# Altium PCB MYBOARD.PcbDoc (part 2 of 2)
Units mil, origin at the board's own origin, x right, y up, seen from the top; angles counter-clockwise.
Board outline 4724.41 x 3940 mil, 2 copper layers (Top Layer, Bottom Layer); 166 components, 173 nets, 742 pads, 144 vias.
Unrouted connection lines stored in the file: 194.
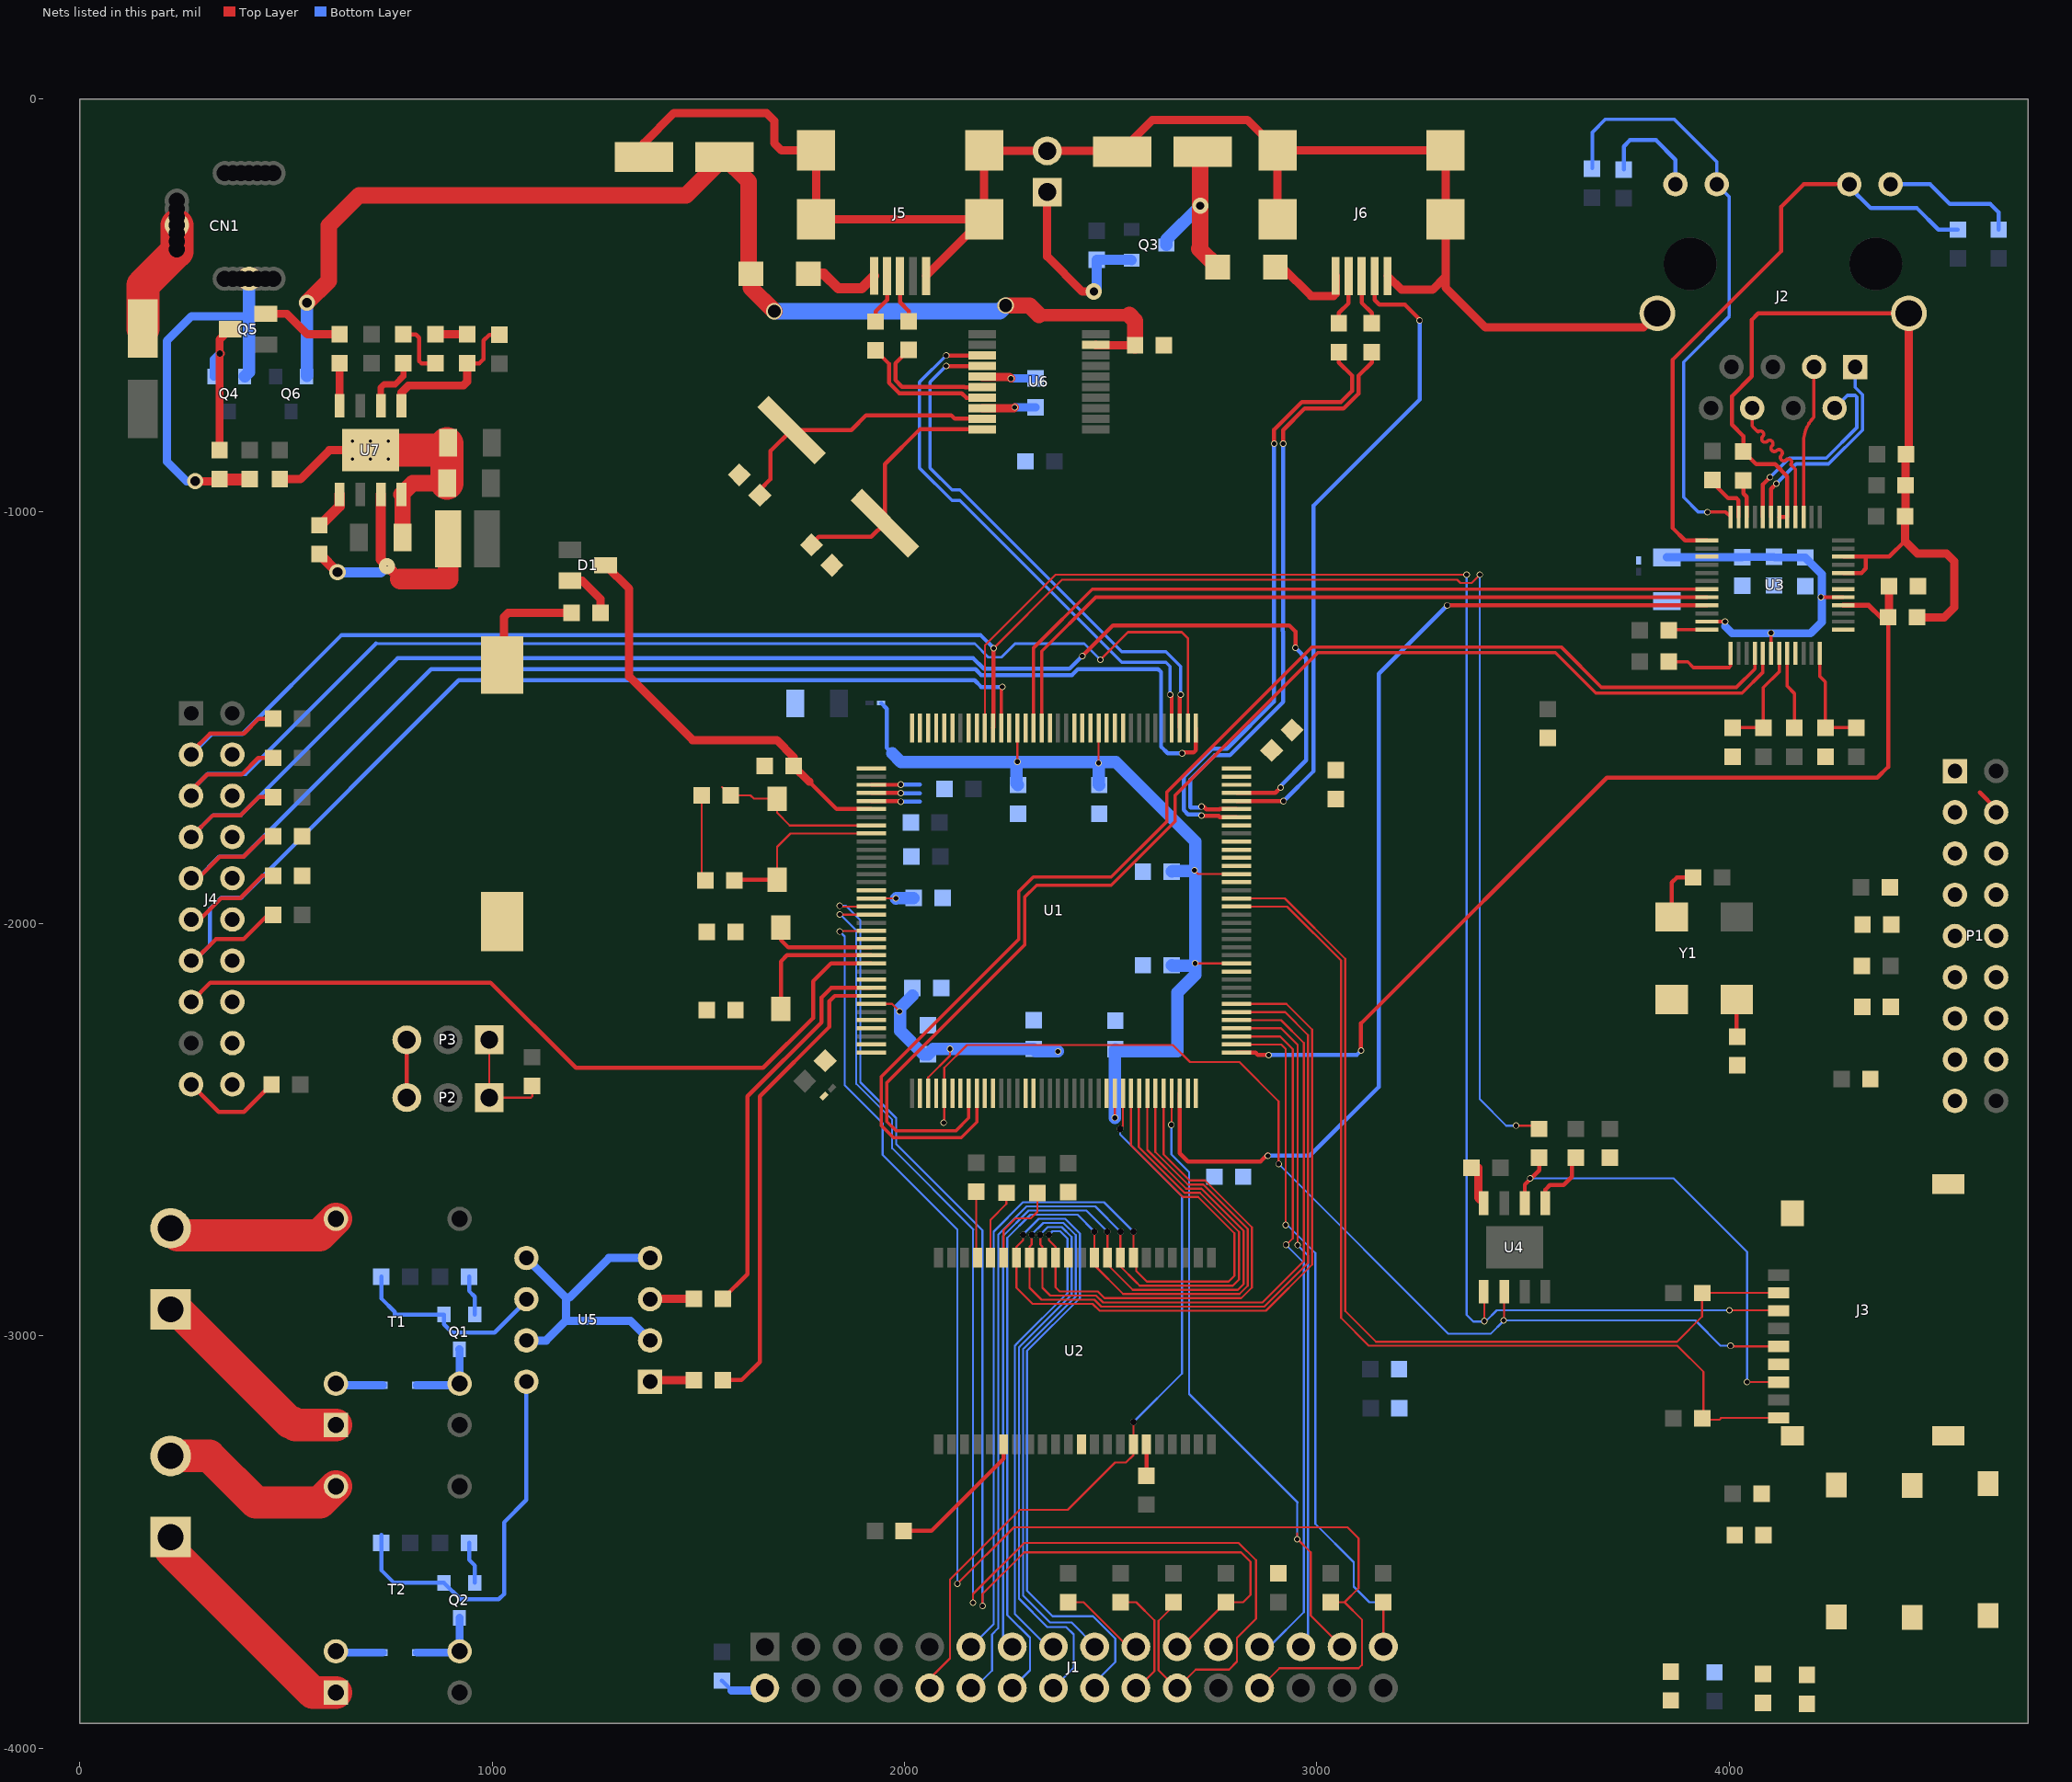
[diagram p2: the nets of this part, all layers, seen from the top]

## Via types
v1: diameter 15.75, hole 11.81, Top Layer to Bottom Layer, 77 vias
v2: diameter 15.75, hole 15.75, Top Layer to Bottom Layer, 32 vias
v3: diameter 19.68, hole 7.87, Top Layer to Bottom Layer, 12 vias
v4: diameter 212.6, hole 137.8, Top Layer to Bottom Layer, 8 vias
v5: diameter 39.37, hole 23.62, Top Layer to Bottom Layer, 4 vias
v6: diameter 39.37, hole 19.68, Top Layer to Bottom Layer, 3 vias
v7: diameter 0/0 (per signal layer), hole 39.37, Top Layer to Bottom Layer, 2 vias
v8: diameter 39.37, hole 31.5, Top Layer to Bottom Layer, 2 vias
v9: diameter 39.37/39.37 (per signal layer), hole 51.18, Top Layer to Bottom Layer, 1 vias
v10: diameter 39.37/39.37 (per signal layer), hole 39.37, Top Layer to Bottom Layer, 1 vias
v11: diameter 39.37, hole 39.37, Top Layer to Bottom Layer, 1 vias
v12: diameter 39.37, hole 0.6, Top Layer to Bottom Layer, 1 vias

## Nets (pads, with @x,y where several pads share a name; then routed paths per layer and width w, separated by ;. In a path a pad name is that pad's centre, name@x,y a point inside that pad or via, vN(x,y) a via of type N, cw(c..) or ccw(c..) an arc to the next point about the centre after c; other vN are vias at no path point) (continued)
D7: J1.10 U1.63 U2.16 | length 1844.7
  Top Layer w5: J1.10@2061,-3854 2061,-3831 2110,-3782 2110,-3591 2279,-3422 2395.72,-3422 2510.72,-3307 2537,-3307 2554.96,-3289.04 U2.16@2554.96,-3262.76 v2(2554.96,-3209) ; v2(2523,-2498) 2529.53,-2491.47 U1.63@2529.53,-2411.42
  Bottom Layer w5: v2(2523,-2498) 2523,-2511.49 2673,-2661.49 2673,-3090.96 v2(2554.96,-3209)
D8: J1.11 U1.64 U2.29 | length 2349
  Top Layer w5: U1.64@2549.21,-2411.42 2549,-2411.63 2549,-2537.43 2674.57,-2663 2712,-2663 2800,-2751 2800,-2854 2786,-2868 2587.27,-2868 2562,-2842.73 2562,-2817.04 U2.29@2554.96,-2810 v2(2554.96,-2747)
  Bottom Layer w5: J1.11@2161,-3754 2216,-3699 2216,-2747 2287,-2676 2483.96,-2676 v2(2554.96,-2747)
D9: J1.12 U1.65 U2.30 | length 2453.9
  Top Layer w5: v2(2523.46,-2747) U2.30@2523.46,-2810 2523.46,-2831.46 2560.5,-2868.5 2570,-2878 2574,-2878 ; U1.65@2568.9,-2411.42 2568,-2412.31 2568,-2542.28 2678.72,-2653 2716.14,-2653 2811,-2747.86 2811,-2863 2796,-2878 2574,-2878 ; 2574,-2878 2574.07,-2878.07 2574,-2878
  Bottom Layer w5: J1.12@2161,-3854 2169.5,-3854 2212,-3811.5 2212,-3724 2227,-3709 2227,-2755 2296,-2686 2462.46,-2686 v2(2523.46,-2747)
D10: J1.13 U1.66 U2.31 | length 2327.6
  Top Layer w5: v2(2491.97,-2747) U2.31@2491.97,-2810 2491.97,-2826.97 2553.28,-2888.28 2578,-2888.28 2578.28,-2888 2808.28,-2888 2822,-2874.28 2822,-2744.72 2720.28,-2643 2682.86,-2643 2588.58,-2548.72 U1.66@2588.58,-2411.42
  Bottom Layer w5: J1.13@2261,-3754 2239,-3732 2239,-2758 2301,-2696 2440.97,-2696 v2(2491.97,-2747)
D11: J1.14 U1.67 U2.32 | length 2456.1
  Top Layer w5: v2(2460.47,-2747) U2.32@2460.47,-2810 2460.47,-2828.47 2530.28,-2898.28 2812.14,-2898.28 2832,-2878.43 2832,-2740.57 2724.43,-2633 2687,-2633 2608,-2554 2608,-2411.68 U1.67@2608.27,-2411.42
  Bottom Layer w5: J1.14@2261,-3854 2304,-3811 2304,-3732 2249,-3677 2249,-2762.14 2305.14,-2706 2419.47,-2706 v2(2460.47,-2747)
D12: J1.15 U1.68 U2.35 | length 2359.3
  Top Layer w5: v2(2349.86,-2755) 2349.86,-2767.76 2365.98,-2783.88 U2.35@2365.98,-2810 2365.98,-2881.98 2376,-2892 2468.43,-2892 2484.71,-2908.28 2816.28,-2908.28 2842,-2882.57 2842,-2736.43 2728.57,-2623 2691.14,-2623 2627.95,-2559.81 U1.68@2627.95,-2411.42
  Bottom Layer w5: v2(2349.86,-2755) 2358.86,-2746 2377,-2746 2395,-2764 2395,-2896 2276,-3015 2273.07,-3017.93 2270.14,-3020.86 2267.21,-3023.79 2267.21,-3674.21 2347,-3754 J1.15@2361,-3754
D13: J1.16 U1.77 U2.36 | length 2879.5
  Top Layer w5: v2(2329.11,-2755) 2329.11,-2778.5 2334.49,-2783.88 U2.36@2334.49,-2810 2334.49,-2883 2353.49,-2902 2464.28,-2902 2481.28,-2919 2868,-2919 2968.37,-2818.63 2968.37,-2289.37 2913.25,-2234.25 U1.77@2805.12,-2234.25
  Bottom Layer w5: v2(2329.11,-2755) 2329.11,-2754.01 2347.12,-2736 2381.14,-2736 2405,-2759.86 2405,-2900.14 2283.07,-3022.07 2280.14,-3025 2277.21,-3027.93 2277.21,-3637.21 2346,-3706 2392,-3706 2410,-3724 2410,-3805 J1.16@2361,-3854
D14: J1.17 U1.78 U2.37 | length 2902.6
  Top Layer w5: v2(2308.37,-2755) 2308.37,-2778.5 2302.99,-2783.88 U2.37@2302.99,-2810 2302.99,-2883 2331.99,-2912 2460.14,-2912 2477.14,-2929 2872.14,-2929 2978.37,-2822.77 2978.37,-2270.37 2923,-2215 2805.55,-2215 U1.78@2805.12,-2214.57
  Bottom Layer w5: v2(2308.37,-2755) 2308.37,-2754.01 2336.37,-2726 2385.28,-2726 2415,-2755.72 2415,-2904.28 2290.14,-3029.14 2287.21,-3032.07 2287.21,-3629.21 2353,-3695 2405,-3695 2461,-3751 J1.17@2461,-3754
D15: J1.18 U1.79 U2.38 | length 3190.7
  Top Layer w5: v2(2287.62,-2755) 2287.62,-2767.76 2271.5,-2783.88 U2.38@2271.5,-2810 2271.5,-2883 2310.5,-2922 2456,-2922 2473,-2939 2876.28,-2939 2988.37,-2826.91 2988.37,-2257.37 2925.88,-2194.88 U1.79@2805.12,-2194.88
  Bottom Layer w5: v2(2287.62,-2755) 2287.62,-2754.01 2325.62,-2716 2389.43,-2716 2425,-2751.57 2425,-2908.43 2297.21,-3036.21 2297.21,-3618.21 2359,-3680 2457,-3680 2511,-3734 2511,-3791 2461,-3841 J1.18@2461,-3854
DBGACK: J4.19 R51.2 | length 250.5
  Top Layer w10: J4.19@270,-2390 337,-2457 398,-2457 R51.2@465,-2390
DC_5V: CN1.+ Q4.2 R58.1 R61.1 | length 980.5
  Top Layer w20: v5(280,-927) R58.1@335,-927
  Top Layer w30: R58.1@335,-927 339,-923 R61.1@412,-923
  Bottom Layer w20: v5(280,-927) 259,-927 211,-879 211,-587 271,-527 410.63,-527
  Bottom Layer w30: Q4.2@400,-673 410.63,-662.37 410.63,-527 CN1.+@410.63,-435.91
DETECT_TF#: J3.9 R38.1 U1.91 | length 2407.5
  Top Layer w5: U1.91@2805.12,-1958.66 2927.66,-1958.66 3058.37,-2089.37 3058.37,-2956.37 3126,-3024 3874,-3024 3937,-3087 3937,-3203 3976,-3203 3980.31,-3198.69 J3.9@4119.58,-3198.69
FLASH_CS#: R33.2 U1.22 U4.1 | length 155.8
  Top Layer w10: U4.1@3554,-2678 3554,-2645 3565,-2634 3598,-2634 3618,-2614 R33.2@3618,-2568
GND: BAT1.2 C1.1 C2.2 C3.2 C4.2 C5.2 C6.2 C7.2 C8.2 C9.2 C10.2 C11.2 C12.2 C13.2 C14.2 C15.2 C16.1 C17.1 C18.1 C19.1 C20.1 C21.1 C22.1 C23.2 C24.2 C25.2 C26.2 C27.2 C28.2 C29.1 C30.1 C31.2 C32.2 C33.2 C34.2 C35.2 C36.2 C37.2 C38.2 C39.2 C40.2 C46.2 C47.2 C49.2 C50.2 C51.2 CN1.-- D2.2 D3.2 J1.2 J2.13 J2.14 J3.6 J3.10 J3.11 J3.12 J3.13 J4.4 J4.6 J4.8 J4.10 J4.12 J4.14 J4.16 J4.18 J4.20 J5.5 J5.MH1 J5.MH2 J5.MH3 J5.MH4 J6.5 J6.MH1 J6.MH2 J6.MH3 J6.MH4 LED1.C LED2.C P1.1 P2.3 P3.3 P4.2 Q5.2 R8.1 R10.1 R17.1 R26.1 R29.1 R30.1 R49.1 R50.1 R63.2 R64.2 R65.2 R69.1 SW1.P$1 SW2.P$2 SW3.P$2 T1.2 T2.2 U1.16 U1.38 U1.51 U1.61 U1.83 U1.94 U1.107 U1.120 U1.130 U2.12 U2.34 U3.5 U3.6 U3.15 U3.33 U3.44 U3.46 U4.4 U5.2 U5.4 U5.5 U5.7 U6.8 U7.4 U7.9 Y1.2 | length 9074.7
  Top Layer w5: C19.1@1508,-1689 1508,-1886 C21.1@1517,-1895
  Top Layer w10: P2.3@793,-2422 P3.3@793,-2282 ; U3.6@4120.84,-1013.65 U3.5@4140.53,-1013.65 4140.53,-915.53 4111,-886 4065,-886 R30.1@4034,-855 4034,-818 4006,-790 4006,-721 4054,-673 4054,-536 4070,-520 J2.14@4435.09,-519.99 ; U3.44@4276.35,-1149.47 4320.47,-1149.47 4331,-1138.95 4331,-1110 ; U3.46@4276.35,-1110.1 4276.46,-1110 4331,-1110 ; 4426,-1072 4388,-1110 4331,-1110
  Top Layer w20: Q5.2@451,-521 502,-521 552,-571 C51.2@630,-571 ; R65.2@485,-922 535,-922 605.28,-851.72 U7.9@705,-851.72 ; U7.4@780,-959 U7.4@783,-962 ; R64.2@862.2,-571 R63.2@939.6,-571 ; C49.2@882.85,-843.85 C49.2@890.7,-836 ; C24.2@1368.12,-141 1368.12,-106.88 1441,-34 1665,-34 1684,-53 1684,-107 1701.93,-124.93 J5.MH3@1785.26,-124.93 J5.MH4@1785.26,-292.26 J5.MH1@2188.8,-292.26 ; J5.5@2051.99,-429.07 J5.MH1@2188.8,-292.26 ; U6.8@2188,-750.13 2264.87,-750.13 v1(2267,-748) ; J6.MH4@2904.52,-292.26 J6.MH3@2904.52,-124.93 ; J6.5@3171.25,-429.07 3205.19,-463 3280,-463 3312,-431 ; C15.2@3391,-2592 3391,-2665 U4.4@3404,-2678 ; J2.13@3825.25,-519.99 3791.24,-554 3409,-554 3312,-457 3312,-431 ; J2.14@4435.09,-519.99 4435.09,-854.91 C7.2@4428,-862 4427,-863 C8.2@4427,-937 4427,-1011 C6.2@4426,-1012 4426,-1072 4456,-1102 4526,-1102 4545,-1121 4545,-1233 4521,-1257 C9.2@4455,-1257 ; J5.MH1@2188.8,-292.26 J5.MH1@2192.74,-292.26 J5.MH2@2192.74,-124.93 2193.81,-126 P4.2@2346,-126 2525.56,-126 C27.2@2527.56,-128 2527.56,-124.44 2601,-51 2830.59,-51 J6.MH3@2904.52,-124.93 ; J6.MH3@2904.52,-124.93 J6.MH2@3312,-124.93 J6.MH1@3312,-292.26 3312,-431
  Top Layer w39.37: U7.4@780,-959 807,-932 C50.2@890.7,-932 ; C47.2@783,-1063 U7.4@783,-962
  Top Layer w80: C46.2@153,-557 153,-452 235.43,-369.57 CN1.--@235.43,-305.98 ; U7.9@705,-851.72 874.98,-851.72 C49.2@882.85,-843.85 ; C50.2@890.7,-932 C49.2@890.7,-836
  Bottom Layer w5: J1.2@1655,-3860 J1.2@1661,-3854
  Bottom Layer w10: C5.2@1557,-3836 1581,-3860
  Bottom Layer w20: T2.2@621,-3765 624,-3768 D3.2@734.46,-3768 ; T1.2@621,-3116 625,-3120 D2.2@734.46,-3120 ; U5.7@1083,-3011 1131,-3011 1179,-2963 ; U5.5@1083,-2811 1179,-2907 ; U5.2@1383,-3011 1335,-2963 1179,-2963 ; U5.4@1383,-2811 1283,-2811 1187,-2907 1179,-2907 ; 1581,-3860 J1.2@1655,-3860 ; v1(2267,-748) C26.2@2318,-748 ; 1179,-2963 1179,-2907
  other v3: 661.69,-873.37 705,-873.37 748.31,-873.37 661.69,-830.06 705,-830.06 748.31,-830.06
K1: Q2.1 R47.2 U5.8 | length 955.2
  Bottom Layer w10: R47.2@731,-3483 R47.2@731,-3502 731,-3568 762,-3599 Q2.1@883,-3599 923,-3639 1016,-3639 1029,-3626 1029,-3452 1083,-3398 U5.8@1083,-3111
K2: Q1.1 R46.2 U5.6 | length 504.8
  Bottom Layer w10: R46.2@731,-2856 731,-2909 764,-2942 764,-2948 Q1.1@883,-2948 883,-2972 903,-2992 1006,-2992 1083,-2915 U5.6@1083,-2911 U5.6@1083,-2899
LEDMODE: R26.2 R27.1 U3.31 | length 271
  Top Layer w8: R26.2@4008,-1525 R27.1@4082.4,-1525 4082.4,-1427.6 4120.84,-1389.16 U3.31@4120.84,-1344.35
LINK/ACTIVE#: J2.10 R68.2 U3.13 | length 1483.3
  Top Layer w10: U3.13@3945.65,-1070.73 3892.73,-1070.73 3863,-1041 3863,-632 4126,-369 4126,-261 4180,-207 J2.10@4291,-207
  Bottom Layer w10: J2.10@4291,-207 4291,-213 4343,-265 4455,-265 4507,-317 R68.2@4554,-317
MDC: R22.2 U1.27 U3.24 | length 93.4
  Top Layer w8: R22.2@3853,-1289 3854.73,-1287.27 U3.24@3945.65,-1287.27
MDIO: R21.2 U1.36 U3.25 | length 188
  Top Layer w8: R21.2@3853,-1365 3899,-1365 3913,-1379 3999,-1379 4002.73,-1375.27 U3.25@4002.73,-1344.35
MII_INTR#: R20.2 U1.122 U3.32 | length 187.7
  Top Layer w8: U3.32@4140.53,-1344.35 4140.53,-1424.53 4157.6,-1441.6 R20.2@4157.6,-1525
NCE1#: R5.1 U1.123 U2.6 | length 349.7
  Top Layer w10: R5.1@1998,-3473 2065,-3473 2240,-3298 U2.6@2240,-3262.76
NCE2#: J1.19 R13.1 U1.124 | length 208.7
  Top Layer w5: R13.1@2397,-3646 2434,-3646 J1.19@2542,-3754
  Bottom Layer w5: J1.19@2542,-3754 J1.19@2561,-3754
NetBAT1_1: BAT1.1 R37.2 | length 287.2
  Top Layer w20: BAT1.1@1024,-1373 1029,-1368 1029,-1256 1039,-1246 R37.2@1193,-1246
NetC11_1: C11.1 C12.1 C13.1 C14.1 L1.1 U3.23 U3.30 U3.41 | length 923.1
  Top Layer w8: U3.23@3945.65,-1267.58 v1(3989.58,-1267.58) ; U3.30@4101.16,-1344.35 v1(4101.16,-1295.16) ; v1(4222,-1208) 4222.53,-1208.53 U3.41@4276.35,-1208.53
  Bottom Layer w8: 3989.58,-1278.58 v1(3989.58,-1267.58) ; C12.1@4030.3,-1111.7 C12.1@4031,-1111 ; v1@4100,-1294 v1(4101.16,-1295.16) ; C11.1@4107,-1111 C11.1@4108,-1110 C11.1@4110,-1112 ; 4224,-1176.5 4224,-1175
  Bottom Layer w19.68: C14.1@3848,-1111.7 C12.1@4030.3,-1111.7 ; 3989.58,-1278.58 4007,-1296 v1@4100,-1296 ; C12.1@4031,-1111 C11.1@4107,-1111 ; v1@4101.16,-1296 4197,-1296 4224,-1269 4224,-1176.5 ; C11.1@4110,-1112 C13.1@4184,-1112 4224,-1152 4224,-1175
NetC18_2: C18.2 U1.71
NetC20_2: C20.2 U1.106
NetC26_1: C26.1 U6.5 | length 131.9
  Top Layer w20: U6.5@2188,-673.36 2188.75,-674.11 2254.11,-674.11 v1(2258,-678)
  Bottom Layer w20: v1(2258,-678) C26.1@2318,-678
NetC31_1: C31.1 C32.1 C33.1 C34.1 C35.1 C36.1 C37.1 C38.1 C39.1 C40.1 L2.1 U1.17 U1.30 U1.39 U1.52 U1.62 U1.72 U1.84 U1.95 U1.108 U1.121 U1.131 U1.144 | length 3267.4
  Top Layer w5: U1.30@1919.29,-2194.88 1969.88,-2194.88 v1(1988,-2213) ; U1.17@1919.29,-1938.98 v1(1979,-1939) ; U1.39@2057.09,-2411.42 2057.09,-2372.91 2110,-2320 v1(2110,-2304) ; v1(2273.62,-1607.38) U1.131@2273.62,-1525.59 ; v1(2470.47,-1610.53) U1.121@2470.47,-1525.59 ; U1.62@2509.84,-2411.42 2509.84,-2470.84 v1(2510,-2471) ; v1(2703,-1871) 2711.92,-1879.92 U1.95@2805.12,-1879.92 ; v1(2704.46,-2096.46) U1.84@2805.12,-2096.46
  Bottom Layer w5: v1@2273,-1608 v1(2273.62,-1607.38) ; v1@2704,-2096 v1(2704.46,-2096.46)
  Bottom Layer w10: L2.1@1943,-1465 1957,-1479 1957,-1574 1970,-1587
  Bottom Layer w30: 1970,-1587 1991,-1608 v1@2271,-1608 ; v1(1979,-1939) 1980,-1938 C38.1@2022,-1938 ; v1@1989,-2213 1989,-2260 2046,-2317 C32.1@2057,-2317 2070,-2304 v1(2110,-2304) C35.1@2313,-2304 2319,-2310 v1(2372,-2310) ; 1989,-2205 C39.1@2019,-2175 ; C31.1@2275,-1664 2271,-1660 v1@2271,-1608 ; v1@2470,-1608 2273,-1608 v1@2271,-1608 ; v1@2471,-1611 2471,-1663 C33.1@2472,-1664 ; v1@2471,-1608 2512,-1608 2705,-1801 2705,-1871 v1(2703,-1871) ; v1(2510,-2471) 2510,-2306 C36.1@2511,-2305 2516,-2310 2662,-2310 2662,-2167 2705,-2124 v1@2705,-2102 ; C37.1@2648,-2101 2649,-2102 v1@2704,-2102 ; C40.1@2648,-1874 2650,-1872 v1@2703,-1872 ; v1@2705,-2096 v1@2705,-1872
NetC41_1: C41.1 L3.1 U1.33
NetC43_1: C43.1 C44.1 U1.32
NetC45_1: C45.1 U7.1 | length 97.1
  Top Layer w25: C45.1@581,-1034 584,-1034 630,-988 U7.1@630,-959
NetC45_2: C45.2 L4.1 U7.3 | length 626.9
  Top Layer w25: C45.2@581,-1104 v5(625,-1148) ; U7.3@730,-959 730,-1117 v12@746,-1133 ; v12(745,-1133) v12@746,-1133 ; 777,-1164 v12@746,-1133
  Top Layer w50: 777,-1164 893,-1164 L4.1@893,-1067
  Bottom Layer w25: v5(625,-1148) 730,-1148 v12(745,-1133)
NetC48_1: C48.1 U7.6 | length 141.9
  Top Layer w15: U7.6@730,-744.43 730,-700 738,-692 765,-692 784.8,-672.2 C48.1@784.8,-641
NetC48_2: C48.2 R64.1 | length 139.8
  Top Layer w10: C48.2@784.8,-571 815,-571 823,-579 823,-636 828,-641 R64.1@862.2,-641
NetC51_1: C51.1 U7.8 | length 103.4
  Top Layer w20: U7.8@630,-744.43 C51.1@630,-641
NetD1_2: D1.2 R37.1 | length 126.1
  Top Layer w20: D1.2@1188.39,-1168.4 1218.4,-1168.4 1263,-1213 R37.1@1263,-1246
NetD2_1: D2.1 Q1.3 T1.5 | length 188.7
  Bottom Layer w20: D2.1@817.53,-3120 917,-3120 T1.5@921,-3116 921,-3033.24 Q1.3@920.4,-3032.64
NetD3_1: D3.1 Q2.3 T2.5 | length 190.6
  Bottom Layer w10: D3.1@817.53,-3768 D3.1@820.53,-3765 ; Q2.3@920.4,-3683.65 Q2.3@921,-3684.24
  Bottom Layer w20: D3.1@817.53,-3768 918,-3768 T2.5@921,-3765 Q2.3@921,-3684.24
NetF1_1: F1.1 J5.1 | length 185.9
  Top Layer w25: F1.1@1767,-424 1804,-424 1839,-459 1896.06,-459 J5.1@1926.01,-429.05
NetF2_1: F2.1 J6.1 | length 221.1
  Top Layer w20: F2.1@2899,-408 2916,-408 2986,-478 3040,-478 3045.27,-472.73 J6.1@3045.27,-429.05
NetJ2_9: J2.9 R19.2 | length 332.2
  Bottom Layer w10: J2.9@4391,-207 4487,-207 4535,-255 4633,-255 4653,-275 R19.2@4653,-317
NetJ2_12: J2.12 R18.2 | length 266.8
  Bottom Layer w10: R18.2@3744,-171 3744,-115 3759,-100 3822,-100 3869.35,-147.35 J2.12@3869.35,-207
NetJ4_11: J4.11 R50.2 | length 243
  Top Layer w10: J4.11@270,-1990 291,-1990 343,-1938 389,-1938 443.2,-1883.8 R50.2@469,-1883.8
NetJ5_2: J5.2 R53.2 | length 122.3
  Top Layer w10: R53.2@1930,-540 1930,-515 1957.5,-487.5 J5.2@1957.5,-429.07
NetJ5_3: J5.3 R54.2 | length 118.6
  Top Layer w10: J5.3@1989,-429.07 1989,-493 2010,-514 R54.2@2010,-539
NetJ6_2: J6.2 R56.2 | length 124.8
  Top Layer w10: R56.2@3053,-544 3053,-519 3076.76,-495.24 J6.2@3076.76,-429.07
NetJ6_3: J6.3 R57.2 | length 125.2
  Top Layer w10: J6.3@3108.26,-429.07 3108.26,-494.26 3133,-519 R57.2@3133,-544
NetK1_1: K1.1 T1.1 | length 516.6
  Top Layer w78.74: K1.1@220.46,-2935.85 234.85,-2935.85 509,-3210 517,-3210 523,-3216 T1.1@621,-3216
NetK1_2: K1.2 T1.3 | length 424.1
  Top Layer w78.74: K1.2@220.46,-2739 237.46,-2756 581,-2756 T1.3@621,-2716
NetK2_1: K2.1 T2.1 | length 575.8
  Top Layer w78.74: K2.1@220.46,-3487.9 220.46,-3520.46 565,-3865 T2.1@621,-3865
NetK2_2: K2.2 T2.3 | length 463.5
  Top Layer w78.74: K2.2@220.46,-3291.05 314.05,-3291.05 427,-3404 582,-3404 T2.3@621,-3365
NetLED1_A: LED1.A R32.1
NetLED2_A: LED2.A R60.1
NetP2_1: P2.1 P3.1 R31.1 | length 270.2
  Top Layer w5: P3.1@993,-2282 P2.1@993,-2422 1094,-2422 1097,-2419 R31.1@1097,-2394
NetQ1_2: Q1.2 R39.2 | length 97.7
  Bottom Layer w10: R39.2@944,-2856 944,-2891 957.8,-2904.8 Q1.2@957.8,-2948
NetQ2_2: Q2.2 R40.2 | length 102.7
  Bottom Layer w10: R40.2@944,-3502 944,-3543 957.8,-3556.8 Q2.2@957.8,-3599
NetQ4_1: Q4.1 Q5.3 R58.2 | length 369.2
  Top Layer w20: R58.2@339,-853 R58.2@339,-852 339,-583.78 Q5.3@364.38,-558.4 ; v2(340,-617) v2@342,-617
  Bottom Layer w20: Q4.1@325.2,-673 325.2,-631.8 v2(340,-617)
NetR24_1: R24.1 Y1.1 | length 140.2
  Top Layer w10: Y1.1@3860.52,-1984 3860.52,-1900.48 3873,-1888 R24.1@3912,-1888
NetR25_1: R25.1 Y1.3 | length 90.4
  Top Layer w10: Y1.3@4018,-2184 4018,-2273 R25.1@4019,-2274
NetR32_2: R32.2 U1.1
NetR35_1: R35.1 U1.143
NetR45_1: R45.1 U5.1 | length 107.7
  Top Layer w20: U5.1@1383,-3111 1387,-3107 R45.1@1489,-3107
NetR48_1: R48.1 U5.3 | length 106.4
  Top Layer w20: U5.3@1383,-2911 1384,-2910 R48.1@1489,-2910
NetR62_2: R62.2 R63.1 U7.5 | length 379.8
  Top Layer w10: U7.5@780,-744.43 780,-712 ; R63.1@939.6,-641 969,-641 979,-631 979,-586 993,-572 R62.2@1017,-572
  Top Layer w20: 780,-712 797,-695 930,-695 939.6,-685.4 R63.1@939.6,-641
NetR66_2: R66.2 U3.11 | length 127.6
  Top Layer w10: R66.2@3959,-924 3959,-930 3997,-968 4017,-968 4022.42,-973.42 U3.11@4022.42,-1013.65
NetSW2_P$1: SW2.P$1 U1.46
NetSW3_P$1: SW3.P$1 U1.47
NLB#: R3.1 U1.141 U2.39 | length 211.6
  Top Layer w5: U2.39@2240,-2810 2240,-2744 2269,-2715 2306,-2715 2322,-2699 R3.1@2322,-2654
NOE#: R1.1 U1.118 U2.41 | length 161.2
  Top Layer w5: R1.1@2174,-2650 2174,-2806.99 U2.41@2177.01,-2810
NUB#: R2.1 U1.142 U2.40 | length 172.9
  Top Layer w5: U2.40@2208.5,-2810 2208.5,-2718.5 2247,-2680 R2.1@2247,-2653
NWE#: R4.1 U1.119 U2.17 | length 76.4
  Top Layer w10: R4.1@2586,-3339 2586.46,-3338.54 U2.17@2586.46,-3262.76
OCS_32_IN: C19.2 U1.8 Y3.2 | length 419.9
  Top Layer w5: 1557.8,-1668.8 C19.2@1578,-1689 1626.49,-1689 1634.49,-1697 Y3.2@1691,-1697 1691,-1731 1721.81,-1761.81 U1.8@1919.29,-1761.81
OCS_32_OUT: C21.2 U1.9 Y3.1 | length 426.1
  Top Layer w5: Y3.1@1691,-1893.85 1691,-1814 1723.5,-1781.5 U1.9@1919.29,-1781.5
  Top Layer w10: C21.2@1587,-1895 1588.15,-1893.85 Y3.1@1691,-1893.85
OCS_IN: C16.2 U1.23 Y2.2 | length 257.1
  Top Layer w10: Y2.2@1700,-2010 1700,-2040 1718,-2058 1918.38,-2058 U1.23@1919.29,-2057.09
OCS_OUT: C17.2 U1.24 Y2.1 | length 340.4
  Top Layer w10: Y2.1@1700,-2206.85 1700,-2092 1715.23,-2076.77 U1.24@1919.29,-2076.77
OTG_FS_DM: R56.1 U1.102 | length 1505.1
  Top Layer w10: v1(2720,-1737.87) 2721.13,-1739 2761.56,-1739 2764.68,-1742.13 U1.102@2805.12,-1742.13 ; v1(2896.25,-836) 2896.25,-802.12 2963.37,-735 3058,-735 3085,-708 3085,-671 3053,-639 R56.1@3053,-614
  Bottom Layer w10: v1(2720,-1737.87) 2717.13,-1735 2687.37,-1735 2677,-1724.63 2677,-1644.37 2745.37,-1576 2782,-1576 2896.25,-1461.75 v1(2896.25,-836)
OTG_FS_DP: R57.1 U1.103 | length 1480.7
  Top Layer w10: v1(2720,-1716.13) 2724.94,-1716.13 2731.82,-1723 2764.13,-1723 2764.68,-1722.44 U1.103@2805.12,-1722.44 ; v1(2918,-836) 2918,-803 2970,-751 3064.63,-751 3101,-714.63 3101,-671 3133,-639 R57.1@3133,-614
  Bottom Layer w10: v1(2720,-1716.13) 2717.13,-1719 2694,-1719 2693,-1718 2693,-1651 2752,-1592 2788.63,-1592 2918,-1462.63 2918,-1291.28 2917.13,-1290.4 2917.13,-1275.6 2918,-1274.72 v1(2918,-836)
OTG_FS_ID: J6.4 U1.104 | length 1606.2
  Top Layer w10: U1.104@2805.12,-1702.76 2805.36,-1703 v1(2919,-1703) ; J6.4@3139.76,-429.07 3139.76,-487.76 3151,-499 3213,-499 3249,-535 v1(3249,-537)
  Bottom Layer w10: v1(2919,-1703) 2992,-1630 2992,-986 3249,-729 v1(3249,-537)
OV_CLK: P1.3 R7.2 U1.139
OV_D0: P1.7 U1.96
OV_D1: P1.10 U1.97
OV_D2: P1.9 U1.98
OV_D3: P1.12 U1.99
OV_D4: P1.11 U1.3 | length 117.9
  Top Layer w10: U1.3@1919.29,-1663.39 1990.47,-1663.39 v1(1991,-1662.86)
  Bottom Layer w10: v1(1991,-1662.86) 2037,-1662.86
OV_D5: P1.14 U1.136
OV_D6: P1.13 U1.4 | length 117.9
  Top Layer w10: U1.4@1919.29,-1683.07 1990.47,-1683.07 v1(1991,-1683.6)
  Bottom Layer w10: v1(1991,-1683.6) 2037,-1683.6
OV_D7: P1.16 U1.5 | length 118.4
  Top Layer w10: U1.5@1919.29,-1702.76 1989.41,-1702.76 v1(1991,-1704.35)
  Bottom Layer w10: v1(1991,-1704.35) 2037,-1704.35
OV_HREF: P1.6 U1.40
OV_PCLK: P1.15 U1.42
OV_PWDN: P1.17 R8.2 R9.1
OV_RESET: P1.8 R10.2 U1.132
OV_SDA: P1.5 R6.2 U1.140
OV_VSYNC: P1.4 U1.137 | length 64.6
  Top Layer w10: 4607,-1682 4647,-1722 P1.4@4647,-1730
PHY_RESET#: C9.1 R23.2 U1.73 U3.40 | length 2470.6
  Top Layer w10: U1.73@2805.12,-2312.99 2850.99,-2312.99 2857,-2319 v1(2883,-2319) ; v1(3107,-2308) 3107,-2242 3703,-1646 4359,-1646 4385,-1620 C9.1@4385,-1257
  Top Layer w11.81: U3.40@4276.35,-1228.21 4338.21,-1228.21 4367,-1257 C9.1@4385,-1257
  Top Layer w19.68: C9.1@4385,-1257 4387,-1255 R23.2@4387,-1182
  Bottom Layer w10: v1(2883,-2319) 2883,-2318 3097,-2318 v1(3107,-2308)
PWRDWN: R30.2 U3.10 | length 92
  Top Layer w10: R30.2@4034,-925 4034,-957 4042.1,-965.1 U3.10@4042.1,-1013.65
RD#: J1.22 R14.1 U1.19 | length 3361.6
  Top Layer w5: v1(1843,-1977.82) 1843.53,-1978.35 U1.19@1919.29,-1978.35 ; v1(2166,-3647) 2166,-3626 2290,-3502 2810,-3502 2852,-3544 2852,-3686.19 2806,-3732.19 2806,-3790 2787,-3809 2706,-3809 J1.22@2661,-3854 2660,-3855 2616,-3811 2616,-3691 R14.1@2651.67,-3655.33
  Bottom Layer w5: v1(1843,-1977.82) 1843.99,-1977.82 1883,-2016.82 1883,-2388.86 1970,-2475.86 1970,-2544.63 2167.32,-2741.95 2166,-2743.26 v1(2166,-3647) ; J1.22@2634,-3837 2651,-3854 J1.22@2661,-3854
RESET#: C28.1 J1.23 J4.15 R23.1 R55.1 SW1.P$2 U1.25 | length 1911.7
  Top Layer w10: J4.15@270,-2190 317,-2143 996,-2143 1203,-2350 1657,-2350 1778,-2229 1778,-2140 1821.54,-2096.46 U1.25@1919.29,-2096.46
RMII_CLK_50M: R25.2 U1.35 U3.42
RMII_CRS_DV: U1.43 U3.37
RS: J1.20 R16.1 U1.127 | length 284.9
  Top Layer w5: R16.1@2524.33,-3646 2562,-3646 2606,-3690 2606,-3813 J1.20@2565,-3854
  Bottom Layer w5: J1.20@2561,-3854 J1.20@2565,-3854
RX+: J2.3 U3.3 | length 370.6
  Top Layer w8: U3.3@4179.9,-1013.65 4179.9,-832.6 cw(c4265.6,-832.6) 4205,-772 4205,-650.28 J2.3@4205.37,-649.91
RX-: J2.6 U3.4 | length 371
  Top Layer w8: J2.6@4055.37,-749.91 4055.37,-793.37 4057.5,-795.5 4058.18,-796.18 4069.49,-807.49 cw(c4075.15,-813.15) 4080.8,-818.8 ccw(c4086.46,-824.46) 4092.12,-830.12 cw(c4097.77,-835.77) 4103.43,-841.43 ccw(c4109.09,-847.09) 4114.75,-852.75 cw(c4120.4,-858.4) 4126.06,-864.06 ccw(c4131.72,-869.72) 4137.37,-875.37 cw(c4143.03,-881.03) 4148.69,-886.69 4160,-898 4160,-930 4160.21,-969 U3.4@4160.21,-1013.65
RXD0: U1.44 U3.29 | length 3143.3
  Top Layer w8: U1.44@2155.51,-2411.42 2155.51,-2471.49 2125,-2502 1979,-2502 1957,-2480 1957,-2386 2291,-2052 2291,-1936 2320.32,-1906.68 2501.32,-1906.68 2656,-1752 2656,-1689 3002.08,-1342.92 3578.08,-1342.92 3676.08,-1440.92 4030.92,-1440.92 4081.47,-1390.37 U3.29@4081.47,-1344.35
RXD1: U1.45 U3.28 | length 3204.3
  Top Layer w8: U1.45@2175.2,-2411.42 2175.2,-2481.19 2137.38,-2519 1973,-2519 1943.08,-2489.08 1943.08,-2372.08 2277.08,-2038.08 2277.08,-1922.08 2312.16,-1887 2501.32,-1887 2636.32,-1752 2636.32,-1680.85 2988.16,-1329 3592,-1329 3690,-1427 4017,-1427 4061.79,-1382.21 U3.28@4061.79,-1344.35
SET_RMII: R28.1 R29.2 U3.36 | length 261.5
  Top Layer w8: U3.36@4219.27,-1344.35 4219.27,-1400.27 4232.8,-1413.8 R29.2@4232.8,-1525 R28.1@4308,-1525
"SPEED 100M#": J2.11 R67.2 U3.12 | length 1451.6
  Top Layer w8: v1(3947,-1002) 3991.09,-1002 U3.12@4002.73,-1013.65
  Bottom Layer w8: R67.2@3667,-169 3668,-168 3668,-81 3700,-49 3866,-49 3969.35,-152.35 J2.11@3969.35,-207 4000,-237.65 4000,-527 3889,-638 3889,-966 3925,-1002 v1(3947,-1002)
SPI1_MISO: J3.7 R36.1 U4.2 | length 1116.8
  Top Layer w5: v1(4043,-3112) 4043.08,-3112.08 J3.7@4119.58,-3112.08
  Top Layer w10: U4.2@3504,-2678 3504,-2633 3539,-2598 R36.1@3539,-2568
  Bottom Layer w5: v1(3517,-2618) 3865,-2618 4043,-2796 v1(4043,-3112)
SPI1_MOSI: J3.3 U1.135 U4.5 | length 4084.9
  Top Layer w5: U1.135@2194.88,-1525.59 2194.88,-1325.12 2366,-1154 v1(3363,-1154) ; U4.5@3404,-2892.57 3406,-2894.57 v1(3406,-2964) ; v1(4000,-2938) 4110.43,-2938 4115.43,-2943 J3.3@4119.58,-2938.85
  Bottom Layer w5: v1(3363,-1154) 3363,-2949 3379,-2965 3405,-2965 v1(3406,-2964) 3410,-2964 3436,-2938 v1(4000,-2938)
SPI1_SCK: J3.5 U1.41 U4.6 | length 2669.8
  Top Layer w5: v1(2095,-2483) 2096.46,-2481.54 U1.41@2096.46,-2411.42 2096.46,-2349.54 2151.37,-2294.63 2650.63,-2294.63 2692,-2336 2812,-2336 2907,-2431 v1(2907,-2583) ; v1(3452.5,-2962.5) 3454,-2961 U4.6@3454,-2892.57 ; v1(4003,-3024) 4004.46,-3025.46 J3.5@4119.58,-3025.46
  Bottom Layer w5: v1(2907,-2583) 3319,-2995 3421,-2995 3452.5,-2963.5 v1(3452.5,-2962.5) 3917.5,-2962.5 3979,-3024 v1(4003,-3024)
SPI2_MISO: J1.25 U1.75 | length 1681.9
  Top Layer w5: U1.75@2805.12,-2273.62 2910.62,-2273.62 2941.37,-2304.37 2941.37,-2763.63 2926,-2779 v1(2925,-2779)
  Bottom Layer w5: J1.25@2861,-3754 2884,-3754 2968.37,-3669.63 2968.37,-2822.37 v1(2925,-2779)
SPI2_MOSI: J1.27 U1.76 | length 1642.2
  Top Layer w5: U1.76@2805.12,-2253.94 2912.94,-2253.94 2953,-2294 v1(2953,-2780)
  Bottom Layer w5: v1(2953,-2780) 2978.37,-2805.37 2978.37,-3736.63 J1.27@2961,-3754
SPI2_SCK: J1.29 U1.69 | length 1530.2
  Top Layer w5: v1(2647,-2488) 2647.64,-2487.36 U1.69@2647.64,-2411.42 ; v1(2952,-3493) v1@2952,-3492 ; 2952,-3479 v1@2952,-3492 ; J1.29@3061,-3754 2985,-3678 2985,-3525 v1@2952,-3492
  Bottom Layer w5: v1(2647,-2488) 2647,-2560 2690,-2603 2690,-3141 2953,-3404 2952,-3405 v1(2952,-3493)
TCK: J4.9 R49.2 U1.109 | length 3146.7
  Top Layer w10: J4.9@270,-1890 287,-1890 339,-1838 397,-1838 446.4,-1788.6 R49.2@469,-1788.6 ; v1(2673,-1587) 2675,-1585 2701,-1585 2706.69,-1579.31 U1.109@2706.69,-1525.59
  Bottom Layer w10: J4.9@270,-1890 286,-1890 338,-1838 397,-1838 852,-1383 2171.79,-1383 2185.79,-1397 2406.21,-1397 2420.21,-1383 2615,-1383 2622,-1390 2622,-1571 2638,-1587 v1(2673,-1587)
TDI: J4.5 R43.1 U1.110 | length 3117.2
  Top Layer w6: v1(2475,-1360) 2542,-1293 2672,-1293 2687.01,-1308.01 2687.01,-1461.99 U1.110@2687.01,-1525.59
  Top Layer w10: J4.5@270,-1690 270,-1677 309,-1638 393,-1638 432.8,-1598.2 R43.1@469,-1598.2
  Bottom Layer w6: 718,-1321 2170,-1321 2203,-1354 2235,-1354 2268,-1321 2436,-1321 v1(2475,-1360)
  Bottom Layer w10: J4.5@270,-1690 270,-1677 310,-1637 402,-1637 718,-1321
TDO: J4.13 R41.1 U1.133 | length 2652.5
  Top Layer w8: U1.133@2234.25,-1525.59 2234.25,-1428.75 v1(2237,-1426)
  Top Layer w10: J4.13@270,-2090 278,-2090 330,-2038 397,-2038 456,-1979 R41.1@469,-1979
  Bottom Layer w10: J4.13@270,-2090 278,-2090 316,-2052 316,-1964 343,-1937 392,-1937 919,-1410 2170,-1410 2186,-1426 v1(2237,-1426)
TF_CS#: J3.2 R34.2 U1.92 | length 2342.6
  Top Layer w5: U1.92@2805.12,-1938.98 2922.12,-1938.98 3068.37,-2085.23 3068.37,-2939.37 3143,-3014 3873,-3014 3934,-2953 R34.2@3934,-2896 3934.46,-2895.54 J3.2@4119.58,-2895.54
TMS: J4.7 R42.1 U1.105 | length 3684
  Top Layer w10: J4.7@270,-1790 323,-1737 390,-1737 433.6,-1693.4 R42.1@469,-1693.4 ; v1(2431,-1351) 2505,-1277 2933,-1277 2948,-1292 v1(2948,-1331) ; U1.105@2805.12,-1683.07 2898.93,-1683.07 v1(2912,-1670)
  Bottom Layer w10: J4.7@270,-1790 323,-1737 390,-1737 771,-1356 2166,-1356 2192,-1382 2400,-1382 v1(2431,-1351) ; v1(2912,-1670) 2912,-1666 2974,-1604 2974,-1357 v1(2948,-1331)
TP_CS#: J1.31 R11.1 U1.74 | length 1693.7
  Top Layer w5: U1.74@2805.12,-2293.31 2913.31,-2293.31 2924,-2304 v1(2924,-2731) ; J1.31@3161,-3754 R11.1@3161,-3646
  Bottom Layer w5: v1(2924,-2731) 2928,-2731 2996,-2799 2996,-3456 3089,-3549 3089,-3608 3127,-3646 3161,-3646
TP_INT#: J1.26 R12.1 U1.21 | length 3460.7
  Top Layer w5: v1(1843,-2019.31) 1844.59,-2017.72 U1.21@1919.29,-2017.72 ; v1(2127.95,-3601) 2264.95,-3464 3074,-3464 3101,-3491 3101,-3612 3067,-3646 ; J1.26@2861,-3854 2909,-3806 3101,-3806 3109,-3798 3109,-3688 3067,-3646 ; R12.1@3033.67,-3646 3067,-3646
  Bottom Layer w5: v1(1843,-2019.31) 1855,-2031.31 1855,-2392 1947,-2484 1947,-2561 2127.95,-2741.95 v1(2127.95,-3601)
TRST#: J4.3 R36.2 R44.1 U1.134 | length 5224.7
  Top Layer w5: v1(2216,-1332) 2382,-1166 3340,-1166 3348,-1174 3375,-1174 v1(3395,-1154) ; v1(3483,-2490) 3531,-2490 R36.2@3539,-2498
  Top Layer w10: J4.3@278,-1590 J4.3@270,-1590 270,-1585 316,-1539 398,-1539 434,-1503 R44.1@469,-1503 ; U1.134@2214.57,-1525.59 2216,-1524.16 v1(2216,-1332)
  Bottom Layer w5: v1(3395,-1154) 3395,-2426 3459,-2490 v1(3483,-2490)
  Bottom Layer w10: J4.3@270,-1590 320,-1540 395,-1540 635,-1300 2184,-1300 v1(2216,-1332)
TURN_T1: R45.2 U1.29 | length 1159.8
  Top Layer w10: R45.2@1559,-3107 1605,-3107 1649,-3063 1649,-2419 1818,-2250 1818,-2188 1830.8,-2175.2 U1.29@1919.29,-2175.2
TURN_T2: R48.2 U1.28 | length 960.4
  Top Layer w10: R48.2@1559,-2910 1619,-2850 1619,-2419 1799,-2239 1799,-2179 1822.49,-2155.51 U1.28@1919.29,-2155.51
TX+: J2.1 U3.7 | length 509.1
  Top Layer w10: U3.7@4101.16,-1013.65 4101.16,-945.84 v1(4114,-933)
  Bottom Layer w8: v1(4114,-933) 4162,-885 4240.8,-885 4323,-802.8 4323,-717.2 4305.37,-699.57 J2.1@4305.37,-649.91
TX-: J2.2 U3.8 | length 505.6
  Top Layer w10: U3.8@4081.47,-1013.65 4081.47,-934.77 v1(4098.62,-917.62)
  Bottom Layer w8: v1(4098.62,-917.62) 4145.24,-871 4235,-871 4309,-797 4309,-723 4305,-719 4286.28,-719 J2.2@4255.37,-749.91
TX_EN: U1.70 U3.21 | length 2583.7
  Top Layer w10: U1.70@2667.32,-2411.42 2667.32,-2557.32 2687,-2577 2863,-2577 2881,-2559 v1(2881,-2563) ; v1(3315.79,-1228.21) U3.21@3945.65,-1228.21
  Bottom Layer w10: v1(2881,-2563) 2983,-2563 3150,-2396 3150,-1394 v1(3315.79,-1228.21)
TXD0: U1.128 U3.20 | length 1853.4
  Top Layer w8: U1.128@2332.68,-1525.59 2332.68,-1339.32 2463.47,-1208.53 U3.20@3945.65,-1208.53
TXD1: U1.129 U3.19 | length 1886
  Top Layer w8: U1.129@2312.99,-1525.59 2312.99,-1331.17 2455.32,-1188.84 U3.19@3945.65,-1188.84
U3_RX: U1.112 U6.3 | length 1344.5
  Top Layer w10: v1(2101,-622.18) U6.3@2188,-622.18 ; v1(2644,-1445) 2647.64,-1448.64 U1.112@2647.64,-1525.59
  Bottom Layer w8: v1(2101,-622.18) 2036.41,-686.77 2036.41,-895 2115,-973.59 2134,-973.59 2526.41,-1366 2634,-1366 2644,-1376 v1(2644,-1445)
U3_TX: U1.111 U6.4 | length 1307.7
  Top Layer w10: v1(2101,-647.77) U6.4@2188,-647.77 ; U1.111@2667.32,-1525.59 2667.32,-1447.27 v1(2669.59,-1445)
  Bottom Layer w8: v1(2101,-647.77) 2062,-686.77 2062,-895 2115,-948 2134,-948 2526.41,-1340.41 2634,-1340.41 2669.59,-1376 v1(2669.59,-1445)
UD+: R54.1 U6.6 | length 303.3
  Top Layer w10: R54.1@2010,-609 1978,-641 1978,-682 1994,-698 2145.62,-698 2146.57,-698.95 U6.6@2188,-698.95
UD-: R53.1 U6.7 | length 332.8
  Top Layer w10: R53.1@1930,-610 1962,-642 1962,-688.63 1987.37,-714 2138.99,-714 2149.54,-724.54 U6.7@2188,-724.54
USB_HOST_PWR#: P4.1 Q3.1 R52.1 | length 469
  Top Layer w20: P4.1@2346,-226 2346,-382 2431,-467 v6(2459,-467)
  Bottom Layer w25: v6(2459,-467) 2466,-460 R52.1@2466,-390 2548.95,-390 Q3.1@2550.35,-391.4
USB_OTG_VBUS: C27.1 F2.2 Q3.3 U1.101 | length 433.6
  Top Layer w40: C27.1@2722.44,-128 2714,-136.44 2717,-139.44 v6(2717,-259) 2717,-360 2714,-363 F2.2@2759,-408
  Bottom Layer w30: Q3.3@2635,-354 2635,-341 v6(2717,-259)
VBAT: C23.1 D1.3 U1.6 | length 1026.9
  Top Layer w10: 1769,-1656 1835.44,-1722.44 U1.6@1919.29,-1722.44
  Top Layer w20: D1.3@1275,-1131 1332,-1188 1332,-1401 1486,-1555 1690,-1555 1731,-1596 C23.1@1731,-1618 1769,-1656
VCCUSB: C24.1 C25.1 F1.2 Q6.2 U6.19 | length 2891
  Top Layer w20: U6.19@2463.59,-596.59 2464,-597 C25.1@2559,-597
  Top Layer w30: 2326,-524 2545,-524
  Top Layer w40: v5(551,-494) 604,-441 604,-307 677,-234 1470,-234 C24.1@1563,-141 1622,-200 1622,-419 F1.2@1627,-424 1627,-458 v8(1684,-515) ; v8(2245,-501) 2303,-501 2326,-524 ; 2545,-524 2559,-538 C25.1@2559,-597
  Bottom Layer w20: Q6.2@549.8,-673 Q6.2@551,-671.8
  Bottom Layer w30: Q6.2@551,-671.8 v5(551,-494)
  Bottom Layer w40: v8(1684,-515) 2231,-515 v8(2245,-501)
WR#: J1.21 R15.1 U1.18 | length 2967.6
  Top Layer w5: v1(1843,-1957.07) 1844.59,-1958.66 U1.18@1919.29,-1958.66 ; v1(2189,-3655) 2189,-3626 2290,-3525 2816,-3525 2839,-3548 2839,-3628 2821,-3646 R15.1@2779,-3646 J1.21@2671,-3754
  Bottom Layer w5: v1(1843,-1957.07) 1858.07,-1957.07 1893,-1992 1893,-2384.72 1980,-2471.72 1980,-2534.95 2189,-2743.95 v1(2189,-3655) ; J1.21@2661,-3754 J1.21@2671,-3754
XI: C29.2 U6.9 Y4.2 | length 656.2
  Top Layer w10: C29.2@1650,-947 1675,-922 1675,-853.73 Y4.2@1725.86,-802.86 1871.14,-802.86 1907,-767 2113,-767 2121.72,-775.72 U6.9@2188,-775.72
XO: C30.2 U6.10 Y4.1 | length 616.2
  Top Layer w10: C30.2@1772,-1082 1792,-1062 1919.27,-1062 Y4.1@1952.14,-1029.14 1952.14,-885.86 2036.68,-801.32 U6.10@2188,-801.32
pads on no net: CN1.+1 CN1.+2 CN1.+3 CN1.+4 CN1.+5 CN1.+6 CN1.- CN1.-1 CN1.-2 CN1.-3 CN1.-4 CN1.-5 CN1.-6 CN1.--1 CN1.--2 CN1.--3 CN1.--4 CN1.--5 CN1.--6 J1.28 J1.30 J1.32 J2.7 J2.8 J2.15 J2.16 J3.1 J3.8 J4.17 J5.4 P1.18 T1.4 T1.6 T2.4 T2.6 U1.2 U1.7 U1.26 U1.34 U1.37 U1.49 U1.93 U1.100 U1.113 U1.116 U1.117 U1.125 U1.126 U3.14 U3.16 U3.17 U3.18 U3.22 U3.26 U3.27 U3.34 U3.35 U3.38 U3.39 U3.43 U3.45 U3.47 U3.48 U4.9 U6.1 U6.2 U6.11 U6.12 U6.13 U6.14 U6.15 U6.16 U6.17 U6.18 U6.20 Y1.5
copper on no net: | length 118.4
  Top Layer w10: 1919.29,-1643.7 1989.41,-1643.7 v1(1991,-1642.11)
  Bottom Layer w10: v1(1991,-1642.11) 2037,-1642.11
  other v3: 3435.69,-2806.94 3479,-2806.94 3522.31,-2806.94 3435.69,-2763.63 3479,-2763.63 3522.31,-2763.63
  other v4: 116,-3828 4609,-3823 1272,-3803 3552,-3803 1272,-411 3552,-411 116,-114 4612,-114
  other v7: 4546.75,-3131.37 4546.75,-2816.41
  other v9: 1024,-1539.54
  other v10: 1024,-1834.81

## Keep-outs
Keep-Out Layer:
  the board outline again, w5

## Silkscreen, mask and mechanical layers (free items; w line width, h text height)
Top Overlay:
  lines w7.87: 1151,-3860.7 1151,-362 cw(c1213.88,-350.88) 1204.66,-287.69 ; 1151.03,-3858.72 ccw(c1212.3,-3860.7) 1210.31,-3921.97 ; 1204.66,-288 3603,-288 ; 1212.3,-3922 3606.62,-3922 ; 3603.04,-288.37 cw(c3610.01,-349.27) 3670.94,-355.99 ; 3605.4,-3922.32 ccw(c3606.62,-3857.67) 3670.63,-3866.81 ; 3671,-3866.49 3671,-356 ; 3671.95,-3867.86 3672,-3867.49 ; 9164.72,-6618.97 ccw(c9166.7,-6557.7) 9227.97,-6559.69
Mechanical 15:
  lines w7.87: 1611,-3902 1612,-3903 3211,-3903 3211,-3704 1611,-3704 1611,-3902

## Dimensions
0,0 to 0,-3940 on Top Overlay
0,-3940 to 4724.41,-3940 on Top Overlay

## Text inside footprints (layer, text, board x,y; h text height)
J3: Top Overlay "5" at 4078.6,-3027.69 h45 r90; Top Overlay "9" at 4078.6,-3204.69 h45 r90; Top Overlay "8" at 4078.6,-3161.69 h45 r90; Top Overlay "1" at 4078.58,-2852.69 h45 r90
J4: Top Overlay "1" at 250,-1410 h45 r270; Top Overlay "2" at 350,-1410 h45 r270; Top Overlay "19" at 250,-2450 h45 r270; Top Overlay "20" at 350,-2450 h45 r270
P1: Top Overlay "2" at 4627,-1510 h45 r270; Top Overlay "1" at 4527,-1530 h45 r270; Top Overlay "17" at 4527,-2510 h45 r270; Top Overlay "18" at 4627,-2510 h45 r270